# EAGLE board itrope-Hive-Bus (EAGLE 7.7.0), part 1 of 2
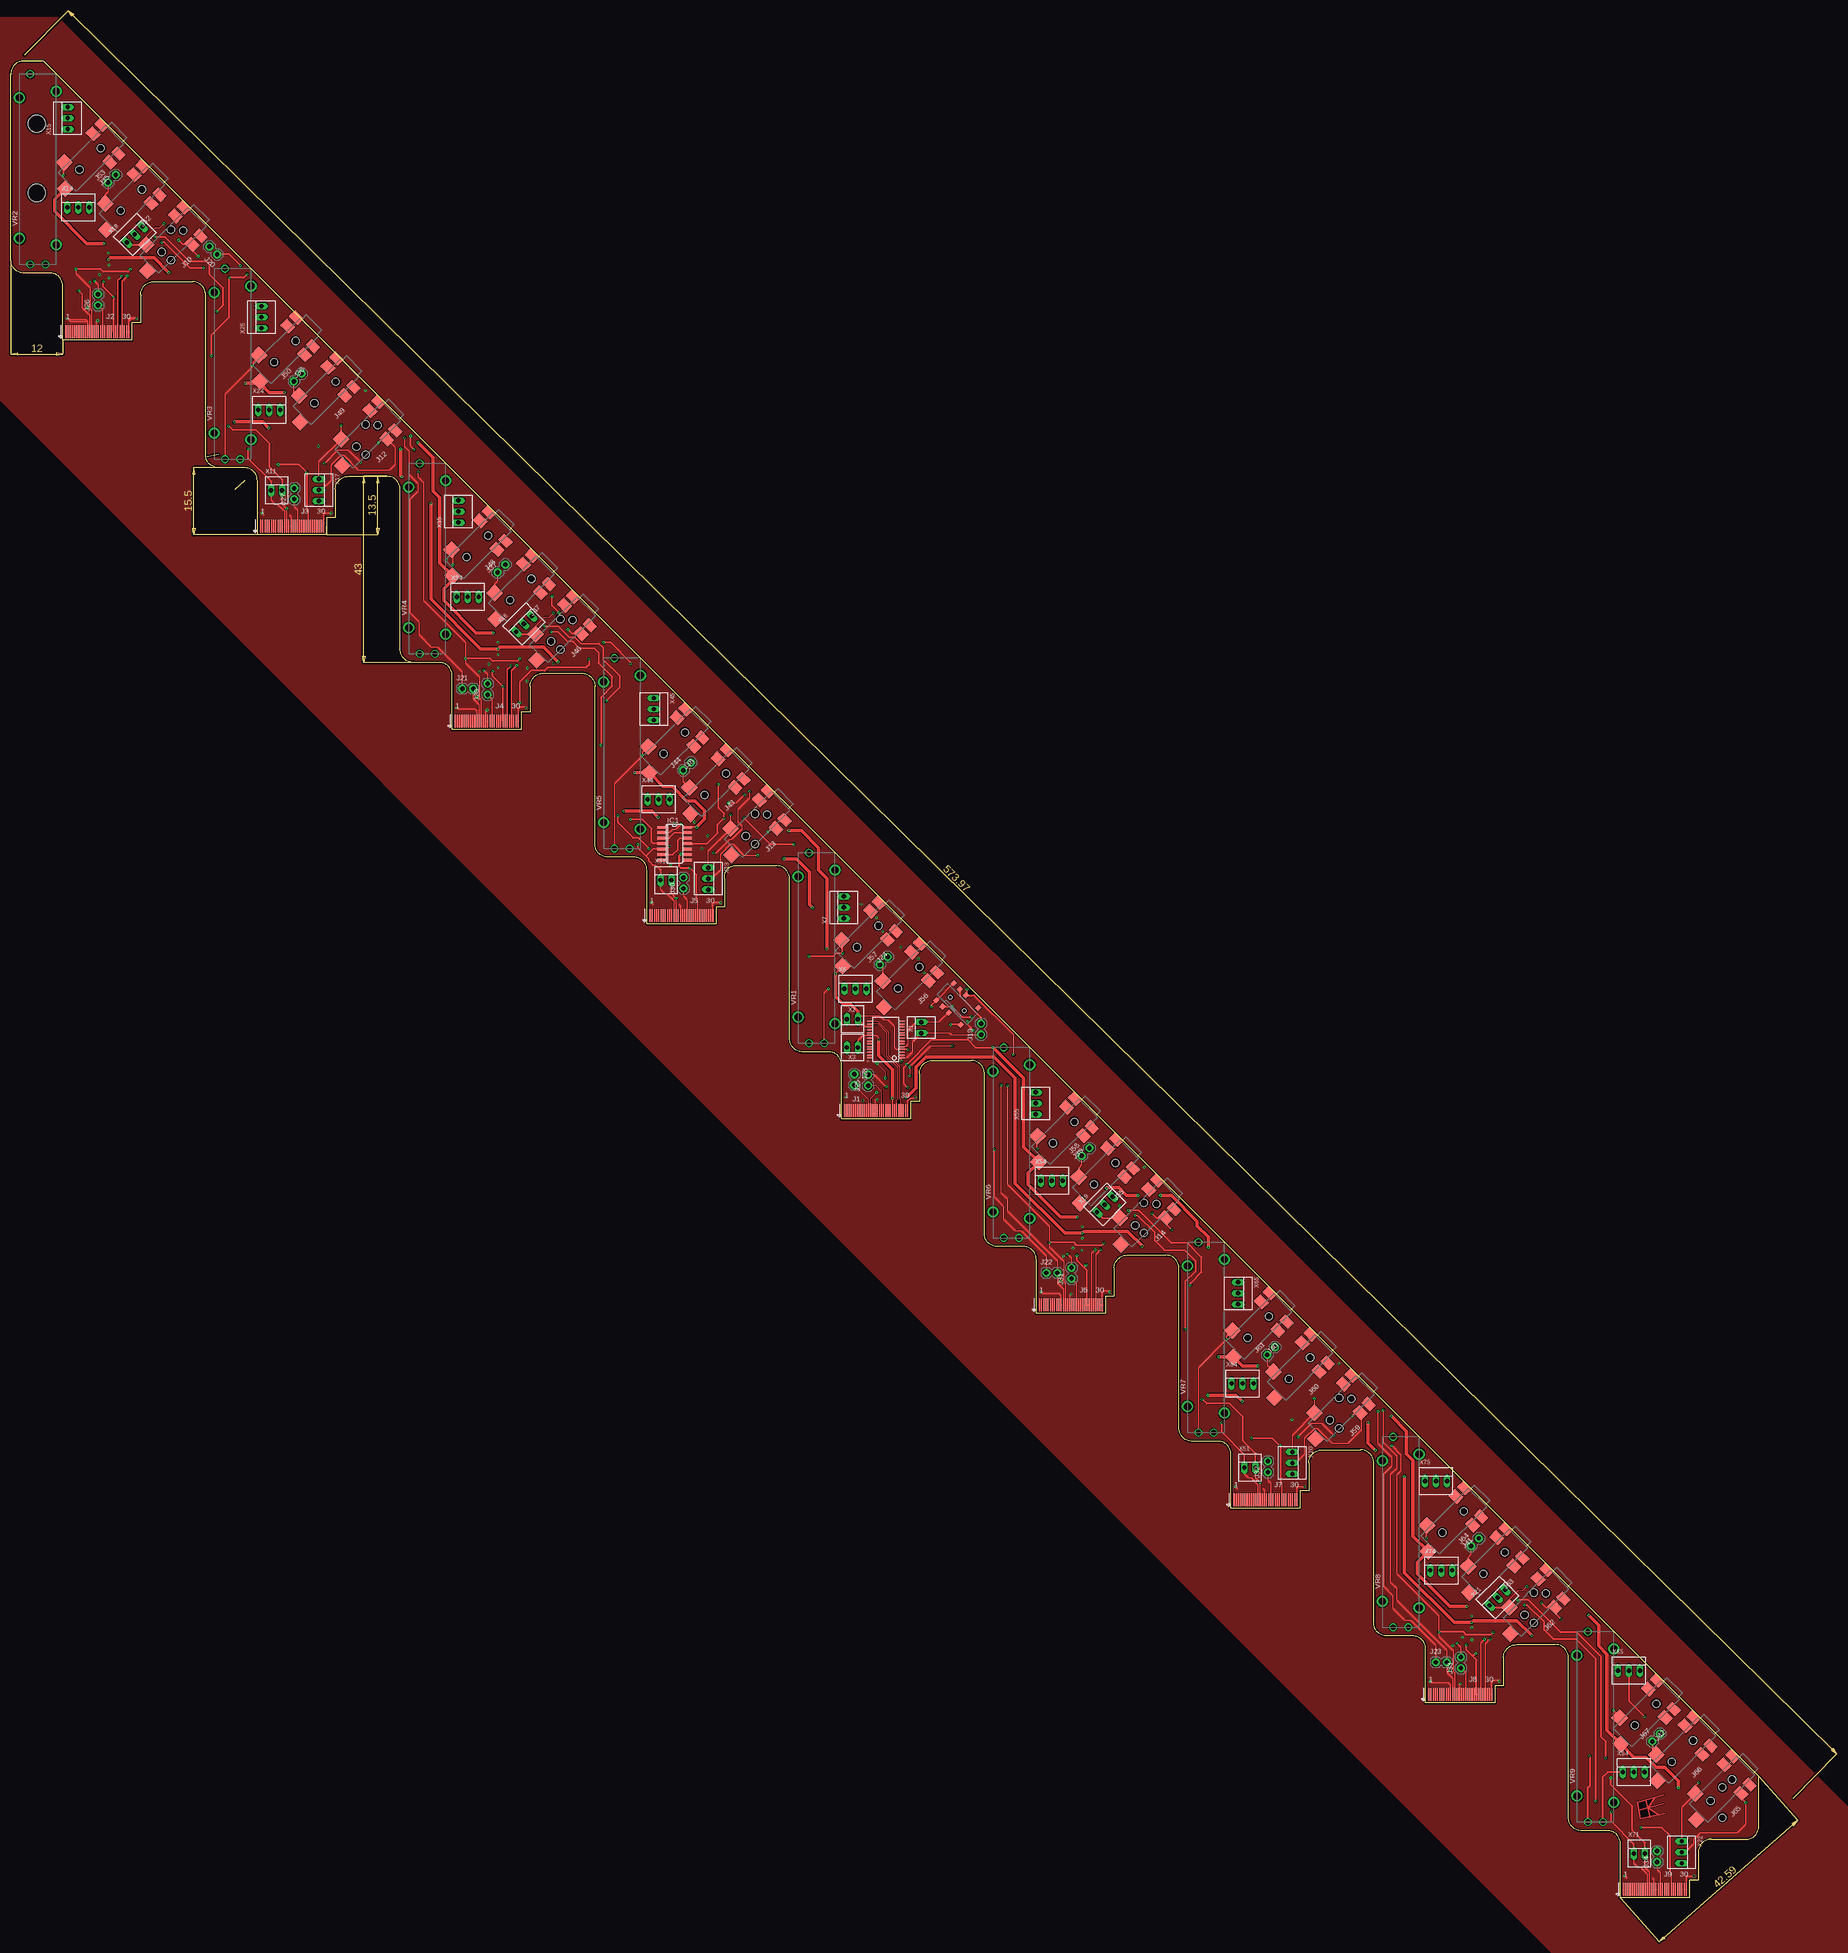
[diagram p0: board, top side]
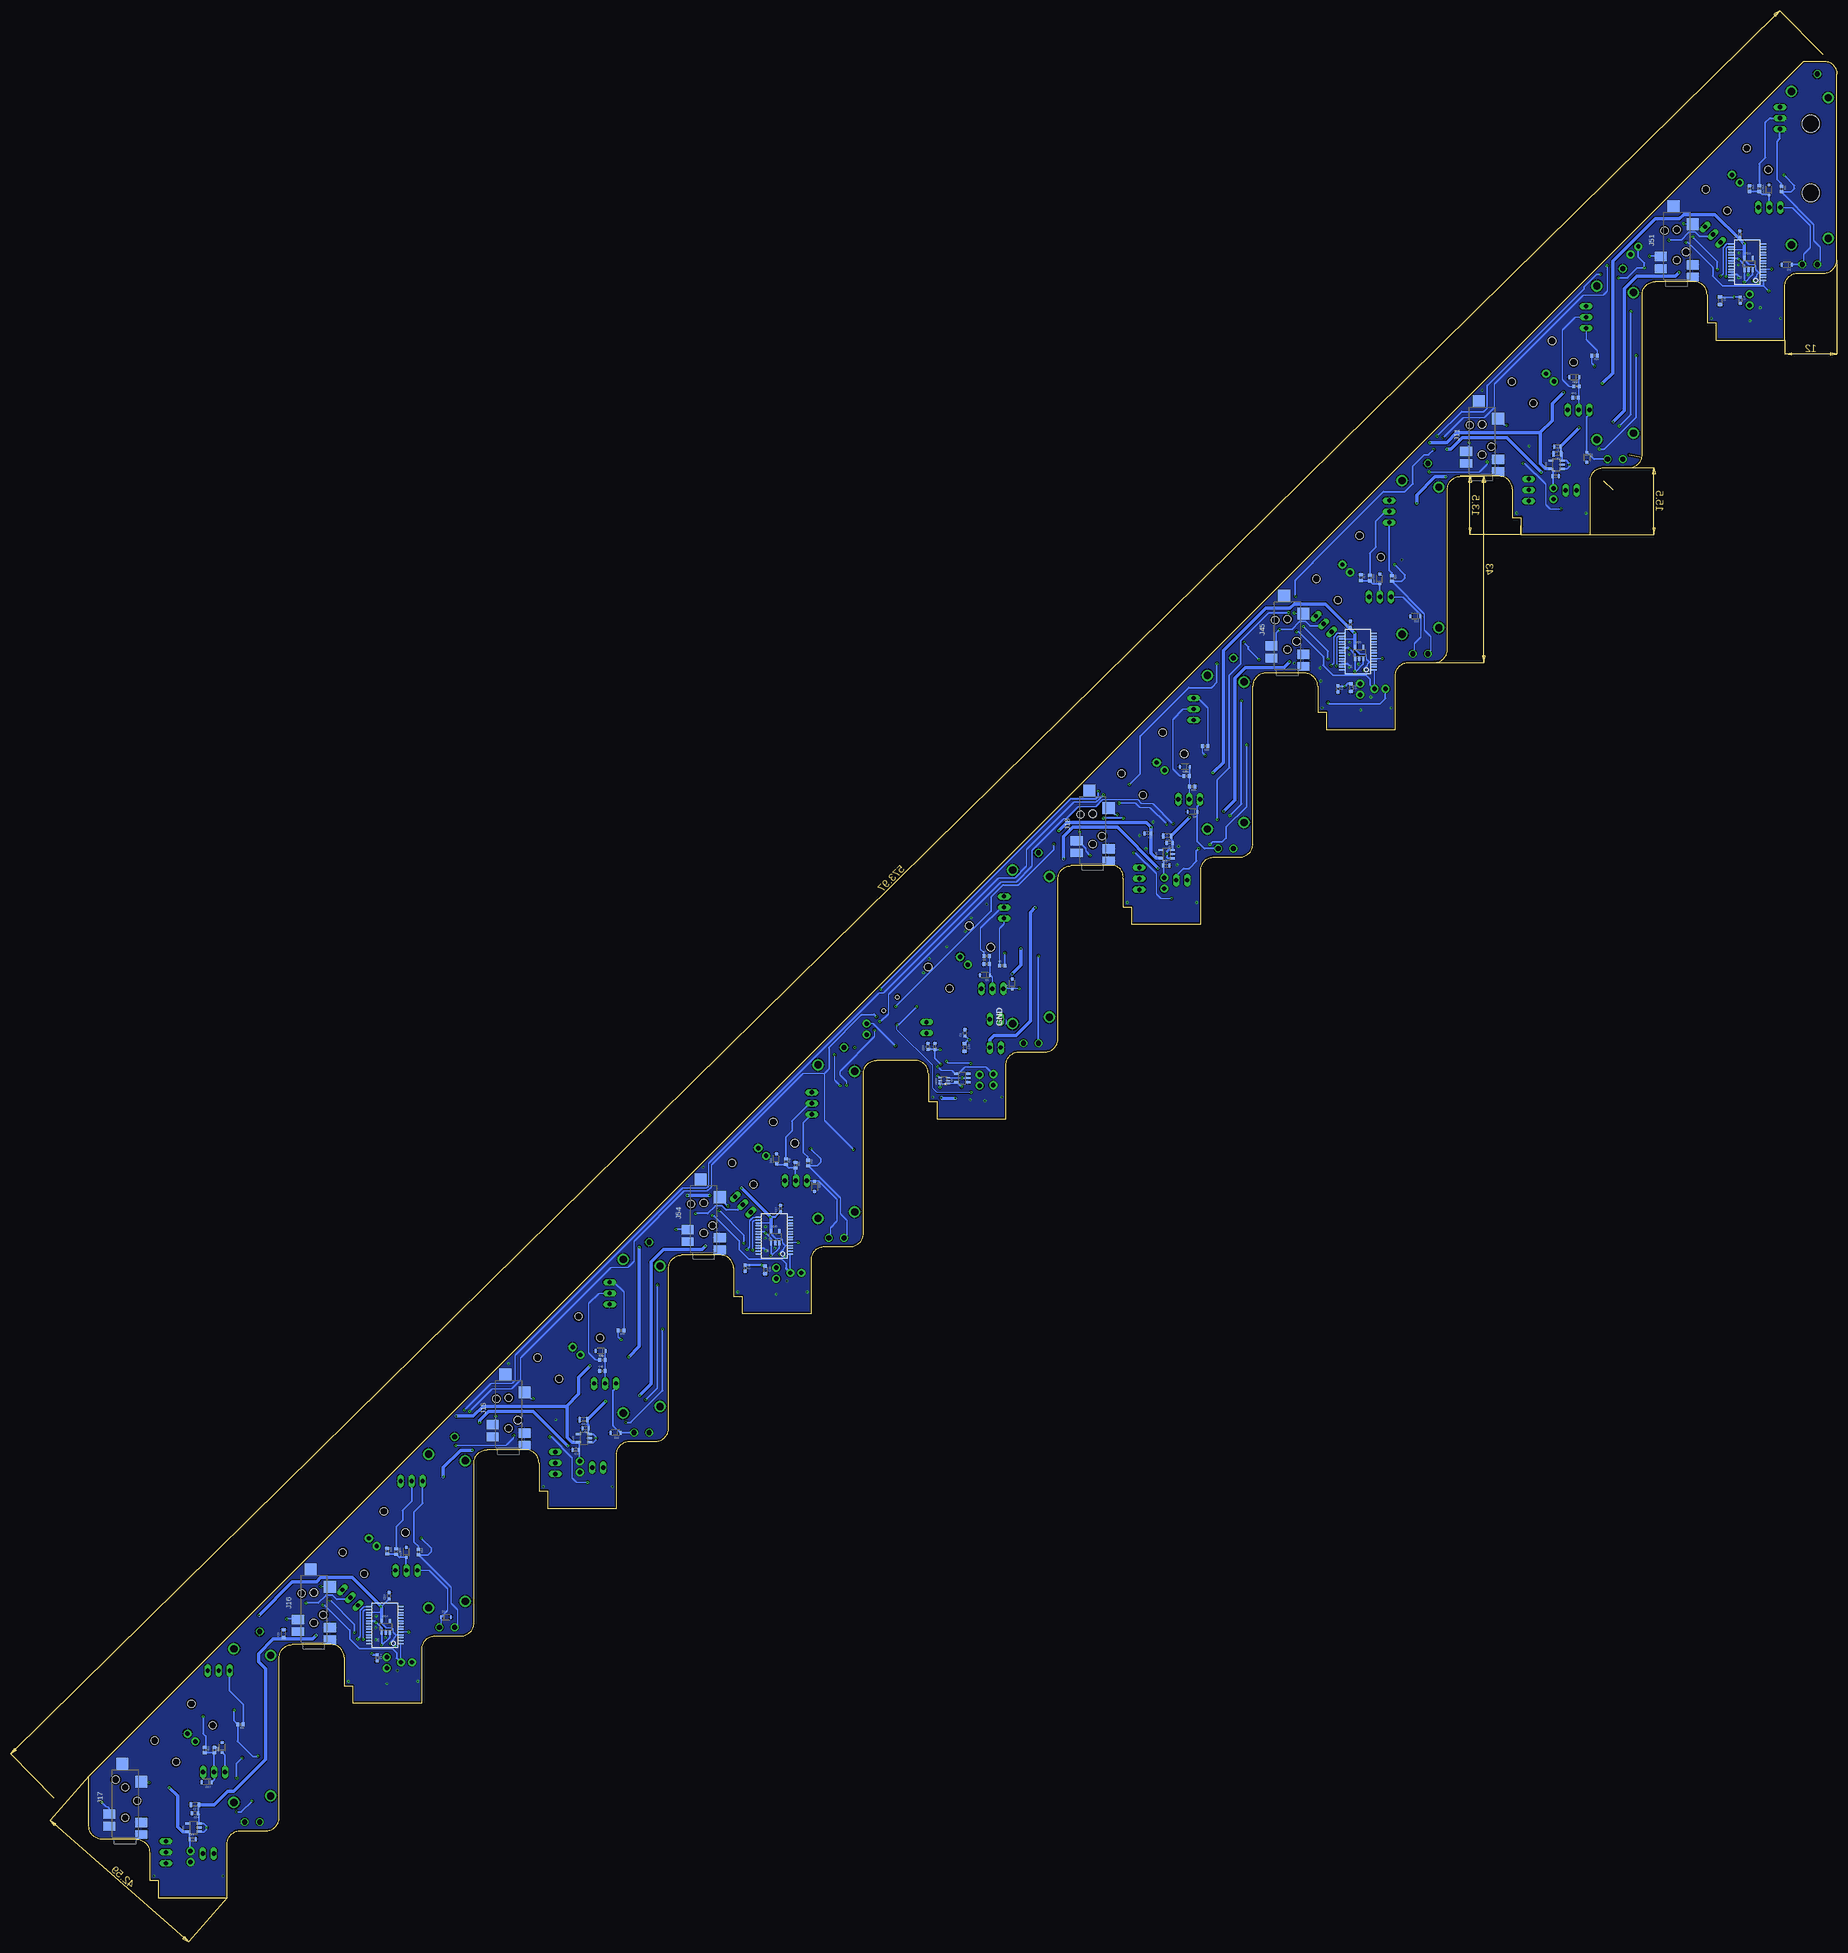
[diagram p1: board, bottom side, seen from below]

Size 404 x 424.5 mm. Coordinates in mm from the lower left corner, seen from the top.
Outline: 30,370.5 30,364 28,364 28,360 12,360 12,372.5 arc90 9,375.5 3,375.5 arc-90 0,378.5 0,421.5 arc-90 3,424.5 7.6,424.5 404,28.1 404,16.5 arc-90 401,13.5 393,13.5 arc90 390,10.5 390,4 388,4 388,0 372,0 372,12.5 arc90 369,15.5 363,15.5 arc-90 360,18.5 360,55.5 arc90 357,58.5 348,58.5 arc90 345,55.5 345,49 343,49 343,45 327,45 327,57.5 arc90 324,60.5 318,60.5 arc-90 315,63.5 315,100.5 arc90 312,103.5 303,103.5 arc90 300,100.5 300,94 298,94 298,90 282,90 282,102.5 arc90 279,105.5 273,105.5 arc-90 270,108.5 270,145.5 arc90 267,148.5 258,148.5 arc90 255,145.5 255,139 253,139 253,135 237,135 237,147.5 arc90 234,150.5 228,150.5 arc-90 225,153.5 225,190.5 arc90 222,193.5 213,193.5 arc90 210,190.5 210,184 208,184 208,180 192,180 192,192.5 arc90 189,195.5 183,195.5 arc-90 180,198.5 180,235.5 arc90 177,238.5 167,238.5 arc90 165,235.5 165,229 163,229 163,225 147,225 147,237.5 arc90 144,240.5 138,240.5 arc-90 135,243.5 135,280 arc90 132,283 123,283 arc90 120,280 120,274 118,274 118,270 102,270 102,282.5 arc90 99,285.5 93,285.5 arc-90 90,288.5 90,325.5 arc90 87,328.5 78,328.5 arc90 75,325.5 75,319 73,319 73,315 57,315 57,327.5 arc90 54,330.5 48,330.5 arc-90 45,333.5 45,370.5 arc90 42,373.5 33,373.5 arc90 30,370.5
Copper layers (1*16): Top 0.0356mm / dielectric 1.5011mm / Bottom 0.0356mm
Design rules "LaenPCBOrder": minimum track width 6mil, minimum drill 13mil, track to track 6mil, track to pad 6mil, pad to pad 6mil, via to via 6mil, smd to smd 6mil, copper to edge 15mil, drill to drill 6mil, minimum pad ring 7mil, minimum via ring 7mil, stop-mask expansion 3mil, vias tented up to drill 0mil, thermal gap 10mil
Net classes: 1 vcc: width 0.203 mm
Holes 4 mm at 6,410 6,394

## Footprints (pad centres in the part's own frame; a part is rotated, then mirrored left to right if it is on the bottom)
CAP-0603 = smd 0.7 x 0.9: 1 -0.7,0; 2 0.7,0
CAP-0805 = smd 0.8 x 1.2: 1 -0.9,0; 2 0.9,0
SOD-323 = smd 0.63 x 0.83: 1 -1.15,0; 2 1.15,0
SO14 = smd 0.66 x 2.032: 1 -3.81,-3.073; 2 -2.54,-3.073; 3 -1.27,-3.073; 4 0,-3.073; 5 1.27,-3.073; 6 2.54,-3.073; 7 3.81,-3.073; 8 3.81,3.073; 9 2.54,3.073; 10 1.27,3.073; 11 0,3.073; 12 -1.27,3.073; 13 -2.54,3.073; 14 -3.81,3.073
30PINEDGE+ITRIP = smd 0.25 x 3: P$1 7.25,1.5; P$2 6.75,1.5; P$3 6.25,1.5; P$4 5.75,1.5; P$5 5.25,1.5; P$6 4.75,1.5; P$7 4.25,1.5; P$8 3.75,1.5; P$9 3.25,1.5; P$10 2.75,1.5; P$11 2.25,1.5; P$12 1.75,1.5; P$13 1.25,1.5; P$14 0.75,1.5; P$15 0.25,1.5; P$16 -0.25,1.5; P$17 -0.75,1.5; P$18 -1.25,1.5; P$19 -1.75,1.5; P$20 -2.25,1.5; P$21 -2.75,1.5; P$22 -3.25,1.5; P$23 -3.75,1.5; P$24 -4.25,1.5; P$25 -4.75,1.5; P$26 -5.25,1.5; P$27 -5.75,1.5; P$28 -6.25,1.5; P$29 -6.75,1.5; P$30 -7.25,1.5
CUI-SJ-4351 = smd 2 x 2.8: 1 0.6,-3.7; 6 2.5,3.7 | smd 2.8 x 2.8: 2 12.8,-3.7; 5 16.9,0.75 | smd 2.2 x 2.8: 3 5.3,3.7; 4 3.4,-3.7 | hole 1.7: 4.5,0; 11.5,0
H02-PTH = drill 1.016 pad 1.88: 1 -1.27,0; 2 1.27,0
C0402 = smd 0.7 x 0.9: 1 -0.65,0; 2 0.65,0
SWITCH-CK-AYZ0203 = smd 1 x 1.15: 1 -4,2.825; 2 -2,2.825; 3 4,2.825; 4 -4,-2.825; 5 -2,-2.825; 6 4,-2.825; C1 0,2.825; C2 0,-2.825 | hole 0.85: -2.25,0; 2.25,0
SSOP28DB = smd 0.348 x 1.397: 1 -4.225,-3.656; 2 -3.575,-3.656; 3 -2.925,-3.656; 4 -2.275,-3.656; 5 -1.625,-3.656; 6 -0.975,-3.656; 7 -0.325,-3.656; 8 0.325,-3.656; 9 0.975,-3.656; 10 1.625,-3.656; 11 2.275,-3.656; 12 2.925,-3.656; 13 3.575,-3.656; 14 4.225,-3.656; 15 4.225,3.656; 16 3.575,3.656; 17 2.925,3.656; 18 2.275,3.656; 19 1.625,3.656; 20 0.975,3.656; 21 0.325,3.656; 22 -0.325,3.656; 23 -0.975,3.656; 24 -1.625,3.656; 25 -2.275,3.656; 26 -2.925,3.656; 27 -3.575,3.656; 28 -4.225,3.656
SOT23-5 = smd 0.55 x 1.2: 1 -0.95,-1.3; 2 0,-1.3; 3 0.95,-1.3; 4 0.95,1.3; 5 -0.95,1.3
SC70-6 = smd 0.4 x 0.85: 1 -0.65,-0.9; 2 0,-0.9; 3 0.65,-0.9; 4 0.65,0.9; 5 0,0.9; 6 -0.65,0.9
POT-SLIDE-30MM = drill 1.2: 1 0,6; 2 0,2.5; 3 44,6 | drill 1.7: P$4 6,8.5; P$5 4.5,0; P$6 40,0; P$7 38.5,8.5
22-23-2021 = drill 1 long: 1 -1.27,0; 2 1.27,0
22-23-2031 = drill 1 long: 1 -2.54,0; 2 0,0; 3 2.54,0

## Placement (x,y rotation side)
C1  0.1uF  [CAP-0603]  201.5,199.9 90 bottom
C2  0.1uF  [CAP-0603]  208.5,196.7 90 bottom
C3  0.1uF  [CAP-0603]  159.3,246 180 bottom
C4  0.1uF  [CAP-0603]  22.3,369.2 270 bottom
C5  0.1uF  [CAP-0603]  22.4,384.5 90 bottom
C6  10uF  [CAP-0805]  27,369.1 270 bottom
C7  10uF  [CAP-0805]  64.6,333.7 180 bottom
C8  0.1uF  [CAP-0603]  65,328.6 0 bottom
C9  0.1uF  [CAP-0603]  64.6,335.4 180 bottom
C10  0.1uF  [CAP-0603]  115.3,279.4 270 bottom
C11  0.1uF  [CAP-0603]  112.4,294.3 90 bottom
C12  10uF  [CAP-0805]  112.3,279.7 270 bottom
C13  0.1uF  [CAP-0603]  155,238.5 0 bottom
C14  0.1uF  [CAP-0603]  154.2,243.8 180 bottom
C15  10uF  [CAP-0805]  154.8,245.4 180 bottom
C16  10uF  [CAP-0805]  247.7,145.1 270 bottom
C17  0.1uF  [CAP-0603]  244.1,159.3 90 bottom
C18  0.1uF  [CAP-0603]  252.3,145.5 270 bottom
C19  0.1uF  [CAP-0603]  291.5,103.5 180 bottom
C20  0.1uF  [CAP-0603]  289.2,108.5 180 bottom
C21  10uF  [CAP-0805]  289.7,110.5 180 bottom
C22  10uF  [CAP-0805]  359,61 90 bottom
C23  0.1uF  [CAP-0603]  334.6,69.8 90 bottom
C24  0.1uF  [CAP-0603]  337.4,55.4 270 bottom
C25  0.1uF  [CAP-0603]  380,13.5 0 bottom
C26  0.1uF  [CAP-0603]  379.5,19.5 180 bottom
C27  10uF  [CAP-0805]  379.5,21.5 180 bottom
C28  0.1uF  [CAP-0603]  210.1,196.7 90 bottom
C30  10uF  [CAP-0805]  201.6,196.5 270 bottom
D1  [SOD-323]  196.9,213.2 180 bottom
D2  [SOD-323]  190.6,211.2 90 bottom
D3  [SOD-323]  15.7,394.7 90 bottom
D4  [SOD-323]  11.6,377.4 180 bottom
D5  [SOD-323]  60.7,351.4 180 bottom
D6  [SOD-323]  57.8,332.9 270 bottom
D7  [SOD-323]  105.65,304.8 90 bottom
D8  [SOD-323]  148.9,250.95 180 bottom
D9  [SOD-323]  150.7,261.35 180 bottom
D10  [SOD-323]  236.3,164.4 270 bottom
D11  [SOD-323]  245.1,170.7 90 bottom
D12  [SOD-323]  282.3,107.45 180 bottom
D13  [SOD-323]  285.7,126.35 180 bottom
D14  [SOD-323]  321.5,64.85 0 bottom
D15  [SOD-323]  330.65,79.8 90 bottom
D16  [SOD-323]  373.2,34.7 90 bottom
D17  [SOD-323]  376.75,26.7 180 bottom
D19  [SOD-323]  97.4,296.15 180 bottom
IC1  74ALS08D  [SO14]  153.4,243.6 270 top
J1  ITRIP-V1  [30PINEDGE+ITRIP]  200,183.5 180 top
J2  ITRIP-V1  [30PINEDGE+ITRIP]  20,363.5 180 top
J3  ITRIP-V1  [30PINEDGE+ITRIP]  65,318.5 180 top
J4  ITRIP-V1  [30PINEDGE+ITRIP]  110,273.5 180 top
J5  ITRIP-V1  [30PINEDGE+ITRIP]  155,228.5 180 top
J6  ITRIP-V1  [30PINEDGE+ITRIP]  245,138.5 180 top
J7  ITRIP-V1  [30PINEDGE+ITRIP]  290,93.5 180 top
J8  ITRIP-V1  [30PINEDGE+ITRIP]  335,48.5 180 top
J9  ITRIP-V1  [30PINEDGE+ITRIP]  380,3.5 180 top
J10  [CUI-SJ-4351]  43,388.5 225 top
J11  [CUI-SJ-4351]  82,329 90 bottom
J12  [CUI-SJ-4351]  88,343.5 225 top
J13  [CUI-SJ-4351]  178,253.5 225 top
J14  [CUI-SJ-4351]  268,163.5 225 top
J15  [CUI-SJ-4351]  307,104 90 bottom
J16  [CUI-SJ-4351]  352,59 90 bottom
J17  [CUI-SJ-4351]  395.6,14 90 bottom
J18  [CUI-SJ-4351]  172,239 90 bottom
J19  [H02-PTH]  224.25,200.75 90 top
J20  [H02-PTH]  46.8,380.7 135 top
J21  [H02-PTH]  105.6,279.4 0 top
J22  [H02-PTH]  240.6,144.4 0 top
J23  [H02-PTH]  330.6,54.4 0 top
J24  [CUI-SJ-4351]  203.7,227.8 225 top
J25  [H02-PTH]  198.15,188.95 90 top
J26  [H02-PTH]  20.15,369.3 90 top
J27  [H02-PTH]  65.5,324.5 90 top
J28  [H02-PTH]  194.95,189.05 270 top
J29  [H02-PTH]  110.2,279.3 90 top
J30  [H02-PTH]  155.45,234.5 90 top
J31  [H02-PTH]  245.15,144.3 90 top
J32  [H02-PTH]  290.55,99.6 90 top
J33  [H02-PTH]  335.15,54.3 90 top
J34  [H02-PTH]  380.5,9.5 90 top
J35  [CUI-SJ-4351]  24,407.5 225 top
J36  [CUI-SJ-4351]  69,363 225 top
J37  [CUI-SJ-4351]  113.5,318 225 top
J38  [CUI-SJ-4351]  159,272.5 225 top
J39  [CUI-SJ-4351]  249,182.5 225 top
J40  [CUI-SJ-4351]  294,137.5 225 top
J41  [CUI-SJ-4351]  339,92.5 225 top
J42  [CUI-SJ-4351]  383.5,48 225 top
J43  [CUI-SJ-4351]  168.5,263 225 top
J44  [H02-PTH]  156.3,261.45 45 top
J45  [CUI-SJ-4351]  127,284 90 bottom
J46  [CUI-SJ-4351]  133,298.5 225 top
J47  [CUI-SJ-4351]  123.5,308 225 top
J48  [H02-PTH]  113.4,307.2 45 top
J49  [CUI-SJ-4351]  78.3,353.55 225 top
J50  [H02-PTH]  66.3,351.35 45 top
J51  [CUI-SJ-4351]  37,374 90 bottom
J52  [CUI-SJ-4351]  33.5,398 225 top
J53  [H02-PTH]  23.35,397.3 45 top
J54  [CUI-SJ-4351]  261.9,149.1 90 bottom
J55  [CUI-SJ-4351]  258.5,173 225 top
J56  [CUI-SJ-4351]  213.2,218.3 225 top
J57  [H02-PTH]  201.75,216.55 45 top
J58  [H02-PTH]  248.4,172.35 45 top
J59  [CUI-SJ-4351]  313,118.5 225 top
J60  [CUI-SJ-4351]  303.5,128 225 top
J61  [H02-PTH]  291.3,126.35 45 top
J62  [CUI-SJ-4351]  358,73.5 225 top
J63  [CUI-SJ-4351]  348.5,83 225 top
J64  [H02-PTH]  338.4,82.15 45 top
J65  [CUI-SJ-4351]  401,30.5 225 top
J66  [CUI-SJ-4351]  392,39.5 225 top
J67  [H02-PTH]  380.3,37 45 top
R5  33k  [C0402]  192.9,215.4 0 bottom
R6  10k  [C0402]  196.5,215.8 0 bottom
R7  33k  [C0402]  196.5,217.6 0 bottom
R12  33k  [C0402]  12.8,394.9 270 bottom
R13  10k  [C0402]  20.2,395 270 bottom
R14  33k  [C0402]  17.9,395 270 bottom
R19  33k  [C0402]  56,356.4 180 bottom
R20  10k  [C0402]  60.4,346.7 0 bottom
R21  33k  [C0402]  60.2,349.3 0 bottom
R26  33k  [C0402]  102.85,304.9 270 bottom
R27  10k  [C0402]  110.05,305.1 270 bottom
R28  33k  [C0402]  107.95,305 270 bottom
R33  33k  [C0402]  146,266.15 180 bottom
R34  10k  [C0402]  149,256.85 180 bottom
R35  33k  [C0402]  150.3,259.25 0 bottom
R40  33k  [C0402]  237.8,169.8 270 bottom
R41  10k  [C0402]  240.7,169.3 270 bottom
R42  33k  [C0402]  242.9,170.1 270 bottom
R47  33k  [C0402]  281,131.15 180 bottom
R48  10k  [C0402]  285.3,121.75 0 bottom
R49  33k  [C0402]  285.3,124.25 0 bottom
R54  33k  [C0402]  327.85,79.9 270 bottom
R55  10k  [C0402]  335.05,80.1 270 bottom
R56  33k  [C0402]  332.95,80 270 bottom
R61  33k  [C0402]  369,40.1 180 bottom
R62  10k  [C0402]  375,34.1 270 bottom
R63  33k  [C0402]  377.2,34.1 270 bottom
SW1  [SWITCH-CK-AYZ0203]  218.75,206.55 315 top
U1  FT232RL-BASICSSOP  [SSOP28DB]  202.22,198.32 90 top
U2  FT232RL-BASICSSOP  [SSOP28DB]  20.7,378 90 bottom
U4  FT232RL-BASICSSOP  [SSOP28DB]  110.7,288 90 bottom
U5  74AHC1G125  [SOT23-5]  202.15,189.45 90 bottom
U6  FT232RL-BASICSSOP  [SSOP28DB]  245.6,153 90 bottom
U8  FT232RL-BASICSSOP  [SSOP28DB]  335.6,63 90 bottom
U$11  V_REG_SOT23-5_EN  [SOT23-5]  20.4,377.6 0 bottom
U$19  V_REG_SOT23-5_EN  [SOT23-5]  64.8,331.2 90 bottom
U$26  V_REG_SOT23-5_EN  [SOT23-5]  110.4,287.7 0 bottom
U$33  V_REG_SOT23-5_EN  [SOT23-5]  154.9,241.2 90 bottom
U$39  74LVC1T45  [SC70-6]  206.35,188.85 90 bottom
U$40  V_REG_SOT23-5_EN  [SOT23-5]  245.4,152.7 0 bottom
U$47  V_REG_SOT23-5_EN  [SOT23-5]  289.6,106.2 90 bottom
U$54  V_REG_SOT23-5_EN  [SOT23-5]  335.4,62.6 0 bottom
U$61  V_REG_SOT23-5_EN  [SOT23-5]  379.8,16.2 90 bottom
VR1  10K  [POT-SLIDE-30MM]  190.5,197.5 90 top
VR2  10K  [POT-SLIDE-30MM]  10.5,377.5 90 top
VR3  10K  [POT-SLIDE-30MM]  55.5,332.5 90 top
VR4  10K  [POT-SLIDE-30MM]  100.5,287.5 90 top
VR5  10K  [POT-SLIDE-30MM]  145.5,242.5 90 top
VR6  10K  [POT-SLIDE-30MM]  235.5,152.5 90 top
VR7  10K  [POT-SLIDE-30MM]  280.5,107.5 90 top
VR8  10K  [POT-SLIDE-30MM]  325.5,62.5 90 top
VR9  10K  [POT-SLIDE-30MM]  370.5,17.5 90 top
X1  22-23-2021  [22-23-2021]  210.4,201.1 90 top
X2  22-23-2021  [22-23-2021]  194.5,203 180 top
X3  22-23-2021  [22-23-2021]  194.5,196.5 180 top
X6  22-23-2031  [22-23-2031]  195.2,210.1 0 top
X7  22-23-2031  [22-23-2031]  192.5,228.9 90 top
X11  22-23-2021  [22-23-2021]  61.4,325.3 0 top
X13  22-23-2031  [22-23-2031]  161.2,235.5 270 top
X14  22-23-2031  [22-23-2031]  15.6,390.65 0 top
X15  22-23-2031  [22-23-2031]  13.15,411.3 90 top
X16  22-23-2031  [22-23-2031]  118.6,294.4 45 top
X17  22-23-2031  [22-23-2031]  71.2,325.35 270 top
X18  22-23-2031  [22-23-2031]  28.65,384.4 45 top
X19  22-23-2031  [22-23-2031]  252.85,160.2 45 top
X20  22-23-2031  [22-23-2031]  296.2,100.45 270 top
X21  22-23-2031  [22-23-2031]  343.6,69.35 45 top
X22  22-23-2031  [22-23-2031]  386.2,10.5 270 top
X24  22-23-2031  [22-23-2031]  59.7,343.85 0 top
X25  22-23-2031  [22-23-2031]  57.95,365.3 90 top
X31  22-23-2021  [22-23-2021]  151.4,235.2 0 top
X34  22-23-2031  [22-23-2031]  105.6,300.65 0 top
X35  22-23-2031  [22-23-2031]  103.45,320.4 90 top
X44  22-23-2031  [22-23-2031]  149.7,253.85 0 top
X45  22-23-2031  [22-23-2031]  148.65,274.7 270 top
X51  22-23-2021  [22-23-2021]  286.4,99.4 0 top
X54  22-23-2031  [22-23-2031]  240.6,165.7 0 top
X55  22-23-2031  [22-23-2031]  236.9,183.6 90 top
X64  22-23-2031  [22-23-2031]  284.7,118.85 0 top
X65  22-23-2031  [22-23-2031]  283.65,139.7 270 top
X71  22-23-2021  [22-23-2021]  376.4,10.2 0 top
X74  22-23-2031  [22-23-2031]  330.6,75.65 0 top
X75  22-23-2031  [22-23-2031]  329.4,96.25 0 top
X84  22-23-2031  [22-23-2031]  375.1,29 0 top
X85  22-23-2031  [22-23-2031]  374,52.5 0 top

## Library data of the parts
C1-C28 C30 D1-D17 D19 J10-J67 SW1 U5 U$11 U$19 U$26 U$33 U$39 U$40 U$47 U$54 U$61 VR1-VR9 = LITTLEBITS
IC1 = 74xx-us
J1-J9 = con-jae-IPOD-edgecard
R5-R7 R12-R14 R19-R21 R26-R28 R33-R35 R40-R42 R47-R49 R54-R56 R61-R63 U1 U2 U4 U6 U8 = SparkFun
X1-X3 X11 X31 X51 X71 = con-molex; MF: MOLEX; MPN: 22-23-2021; OC_FARNELL: 1462926; OC_NEWARK: 25C3832
X6 X7 X13-X22 X24 X25 X34 X35 X44 X45 X54 X55 X64 X65 X74 X75 X84 X85 = con-molex; MF: MOLEX; MPN: 22-23-2031; OC_FARNELL: 1462950; OC_NEWARK: 30C0862

## Nets
1D+: J2.P$27 U2.15
1D-: J2.P$25 U2.16
2D+: J4.P$27 U4.15
2D-: J4.P$25 U4.16
3D+: J6.P$27 U6.15
3D-: J6.P$25 U6.16
4D+: J8.P$27 U8.15
4D-: J8.P$25 U8.16
5V [vcc]: C1.1 C4.1 C6.1 C7.1 C9.1 C10.1 C12.1 C14.1 C15.1 C16.1 C18.1 C20.1 C21.1 C22.1 C24.1 C26.1 C27.1 C30.1 J1.P$23 J2.P$23 J3.P$23 J4.P$23 J5.P$23 J6.P$23 J7.P$23 J8.P$23 J9.P$23 U1.20 U2.20 U4.20 U6.20 U8.20 U$11.1 U$11.3 U$19.1 U$19.3 U$26.1 U$26.3 U$33.1 U$33.3 U$40.1 U$40.3 U$47.1 U$47.3 U$54.1 U$54.3 U$61.1 U$61.3 X3.1
+3V3: C2.1 C3.1 C5.1 C8.1 C11.1 C13.1 C17.1 C19.1 C23.1 C25.1 C28.1 IC1.14 J24.5 J25.2 J26.2 J27.2 J29.2 J30.2 J31.2 J32.2 J33.2 J34.2 J35.5 J36.5 J37.5 J38.5 J39.5 J40.5 J41.5 J42.5 U1.4 U1.17 U2.4 U2.17 U4.4 U4.17 U5.5 U6.4 U6.17 U8.4 U8.17 U$11.5 U$19.5 U$26.5 U$33.5 U$39.1 U$39.5 U$39.6 U$40.5 U$47.5 U$54.5 U$61.5 X2.1
COD+: J1.P$27 U1.15
COD-: J1.P$25 U1.16
GND [vcc]: C1.2 C2.2 C3.2 C4.2 C5.2 C6.2 C7.2 C8.2 C9.2 C10.2 C11.2 C12.2 C13.2 C14.2 C15.2 C16.2 C17.2 C18.2 C19.2 C20.2 C21.2 C22.2 C23.2 C24.2 C25.2 C26.2 C27.2 C28.2 C30.2 D1.2 D2.2 D3.2 D4.2 D5.2 D6.2 D7.2 D8.2 D9.2 D10.2 D11.2 D12.2 D13.2 D14.2 D15.2 D16.2 D17.2 D19.2 IC1.7 J1.P$1 J1.P$11 J1.P$15 J1.P$16 J1.P$29 J1.P$30 J2.P$1 J2.P$11 J2.P$15 J2.P$16 J2.P$29 J2.P$30 J3.P$1 J3.P$11 J3.P$15 J3.P$16 J3.P$29 J3.P$30 J4.P$1 J4.P$11 J4.P$15 J4.P$16 J4.P$29 J4.P$30 J5.P$1 J5.P$11 J5.P$15 J5.P$16 J5.P$29 J5.P$30 J6.P$1 J6.P$11 J6.P$15 J6.P$16 J6.P$29 J6.P$30 J7.P$1 J7.P$11 J7.P$15 J7.P$16 J7.P$29 J7.P$30 J8.P$1 J8.P$11 J8.P$15 J8.P$16 J8.P$29 J8.P$30 J9.P$1 J9.P$11 J9.P$15 J9.P$16 J9.P$29 J9.P$30 J10.1 J10.4 J11.1 J11.4 J12.1 J12.4 J13.1 J13.4 J14.1 J14.4 J15.1 J15.4 J16.1 J16.4 J17.1 J17.4 J18.1 J18.4 J24.1 J24.4 J35.1 J35.4 J36.1 J36.4 J37.1 J37.4 J38.1 J38.4 J39.1 J39.4 J40.1 J40.4 J41.1 J41.4 J42.1 J42.4 J43.1 J43.4 J44.2 J45.1 J45.4 J46.1 J46.4 J47.1 J47.4 J48.2 J49.1 J49.4 J50.2 J51.1 J51.4 J52.1 J52.4 J53.2 J54.1 J54.4 J55.1 J55.4 J56.1 J56.4 J57.2 J58.2 J59.1 J59.4 J60.1 J60.4 J61.2 J62.1 J62.4 J63.1 J63.4 J64.2 J65.1 J65.4 J66.1 J66.4 J67.2 R6.1 R13.1 R20.1 R27.1 R34.1 R41.1 R48.1 R55.1 R62.1 U1.7 U1.18 U1.21 U1.25 U1.26 U2.7 U2.18 U2.21 U2.25 U2.26 U4.7 U4.18 U4.21 U4.25 U4.26 U5.1 U5.3 U6.7 U6.18 U6.21 U6.25 U6.26 U8.7 U8.18 U8.21 U8.25 U8.26 U$11.2 U$19.2 U$26.2 U$33.2 U$39.2 U$40.2 U$47.2 U$54.2 U$61.2 VR1.3 VR1.P$4 VR1.P$5 VR1.P$6 VR1.P$7 VR2.3 VR2.P$4 VR2.P$5 VR2.P$6 VR2.P$7 VR3.3 VR3.P$4 VR3.P$5 VR3.P$6 VR3.P$7 VR4.3 VR4.P$4 VR4.P$5 VR4.P$6 VR4.P$7 VR5.3 VR5.P$4 VR5.P$5 VR5.P$6 VR5.P$7 VR6.3 VR6.P$4 VR6.P$5 VR6.P$6 VR6.P$7 VR7.3 VR7.P$4 VR7.P$5 VR7.P$6 VR7.P$7 VR8.3 VR8.P$4 VR8.P$5 VR8.P$6 VR8.P$7 VR9.3 VR9.P$4 VR9.P$5 VR9.P$6 VR9.P$7 X2.2 X3.2 X6.3 X7.3 X13.3 X14.3 X15.3 X16.3 X17.3 X18.3 X19.3 X20.3 X21.3 X22.3 X24.3 X25.3 X34.3 X35.3 X44.3 X45.3 X54.3 X55.3 X64.3 X65.3 X74.3 X75.3 X84.3 X85.3
LCV1-1: D4.1 VR2.2 X14.1
LCV1-2: D6.1 VR3.2 X24.1
LCV1-3: D19.1 VR4.2 X34.1
LCV1-4: D8.1 VR5.2 X44.1
LCV1-5: D10.1 VR6.2 X54.1
LCV1-6: D12.1 VR7.2 X64.1
LCV1-7: D14.1 VR8.2 X74.1
LCV1-8: D16.1 VR9.2 X84.1
LCV1-CO: D2.1 VR1.2 X6.1
LCV2-1: D3.1 R13.2 R14.2 X14.2
LCV2-2: D5.1 R20.2 R21.2 X24.2
LCV2-3: D7.1 R27.2 R28.2 X34.2
LCV2-4: D9.1 R34.2 R35.2 X44.2
LCV2-5: D11.1 R41.2 R42.2 X54.2
LCV2-6: D13.1 R48.2 R49.2 X64.2
LCV2-7: D15.1 R55.2 R56.2 X74.2
LCV2-8: D17.1 R62.2 R63.2 X84.2
LCV2-CO: D1.1 R6.2 R7.2 X6.2
N$2: R7.1 X7.2
N$5: R5.1 X7.1
N$6: J1.P$18 J25.1
N$10: R14.1 X15.2
N$11: R12.1 X15.1
N$12: J24.2 R5.2 VR1.1
N$13: J2.P$18 J26.1
N$14: J3.P$18 J27.1
N$15: R21.1 X25.2
N$16: R19.1 X25.1
N$17: J4.P$18 J29.1
N$20: R28.1 X35.2
N$21: R26.1 X35.1
N$22: J5.P$18 J30.1
N$23: J6.P$18 J31.1
N$24: J7.P$18 J32.1
N$25: R35.1 X45.2
N$26: R33.1 X45.1
N$27: J8.P$18 J33.1
N$30: R42.1 X55.2
N$31: R40.1 X55.1
N$32: IC1.6 IC1.12
N$33: IC1.3 IC1.13
N$34: J1.P$12 J28.2
N$35: R49.1 X65.2
N$36: R47.1 X65.1
N$37: J9.P$18 J34.1
N$40: R56.1 X75.2
N$41: R54.1 X75.1
N$42: J35.2 R12.2 VR2.1
N$43: J36.2 R19.2 VR3.1
N$44: J37.2 R26.2 VR4.1
N$45: R63.1 X85.2
N$46: R61.1 X85.1
N$47: J38.2 R33.2 VR5.1
N$48: J39.2 R40.2 VR6.1
N$49: J40.2 R47.2 VR7.1
N$50: J41.2 R54.2 VR8.1
N$51: J42.2 R61.2 VR9.1
N$52: J13.2 J18.2 X13.1
N$53: J13.3 J18.3 X13.2
N$54: J43.2 J44.1
N$55: J45.2 J46.2 X16.1
N$56: J45.3 J46.3 X16.2
N$57: J47.2 J48.1
N$58: J11.2 J12.2 X17.1
N$59: J11.3 J12.3 X17.2
N$60: J49.2 J50.1
N$61: J10.2 J51.2 X18.1
N$62: J10.3 J51.3 X18.2
N$63: J52.2 J53.1
N$64: J14.2 J54.2 X19.1
N$65: J14.3 J54.3 X19.2
N$66: J56.2 J57.1
N$67: J55.2 J58.1
N$68: J15.2 J59.2 X20.1
N$69: J15.3 J59.3 X20.2
N$70: J60.2 J61.1
N$71: J16.2 J62.2 X21.1
N$72: J16.3 J62.3 X21.2
N$73: J63.2 J64.1
N$74: J17.2 J65.2 X22.1
N$75: J17.3 J65.3 X22.2
N$76: J66.2 J67.1
RXD: J2.P$13 J3.P$13 J4.P$13 J5.P$13 J6.P$13 J7.P$13 J8.P$13 J9.P$13 SW1.C1 U2.5 U4.5 U6.5 U8.5 X11.2 X31.2 X51.2 X71.2
RXUSB: SW1.C2 U1.5 X1.2
TXBUS: IC1.11 J20.1 J21.1 J22.1 J23.1 SW1.5
TXCO: J1.P$13 SW1.1 SW1.4 SW1.6
TXD1: IC1.4 J2.P$12 J3.P$12 J20.2 U2.1 X11.1
TXD2: IC1.5 J4.P$12 J5.P$12 J21.2 U4.1 X31.1
TXD3: IC1.1 J6.P$12 J7.P$12 J22.2 U6.1 X51.1
TXD4: IC1.2 J8.P$12 J9.P$12 J23.2 U8.1 X71.1
TXUSB: J19.2 J28.1 SW1.2 U5.4 U$39.4
TXUSB_FTDI: J19.1 U1.1 U5.2 U$39.3 X1.1